# EAGLE board rgbstripe_fft_pcb (EAGLE 9.6.2)
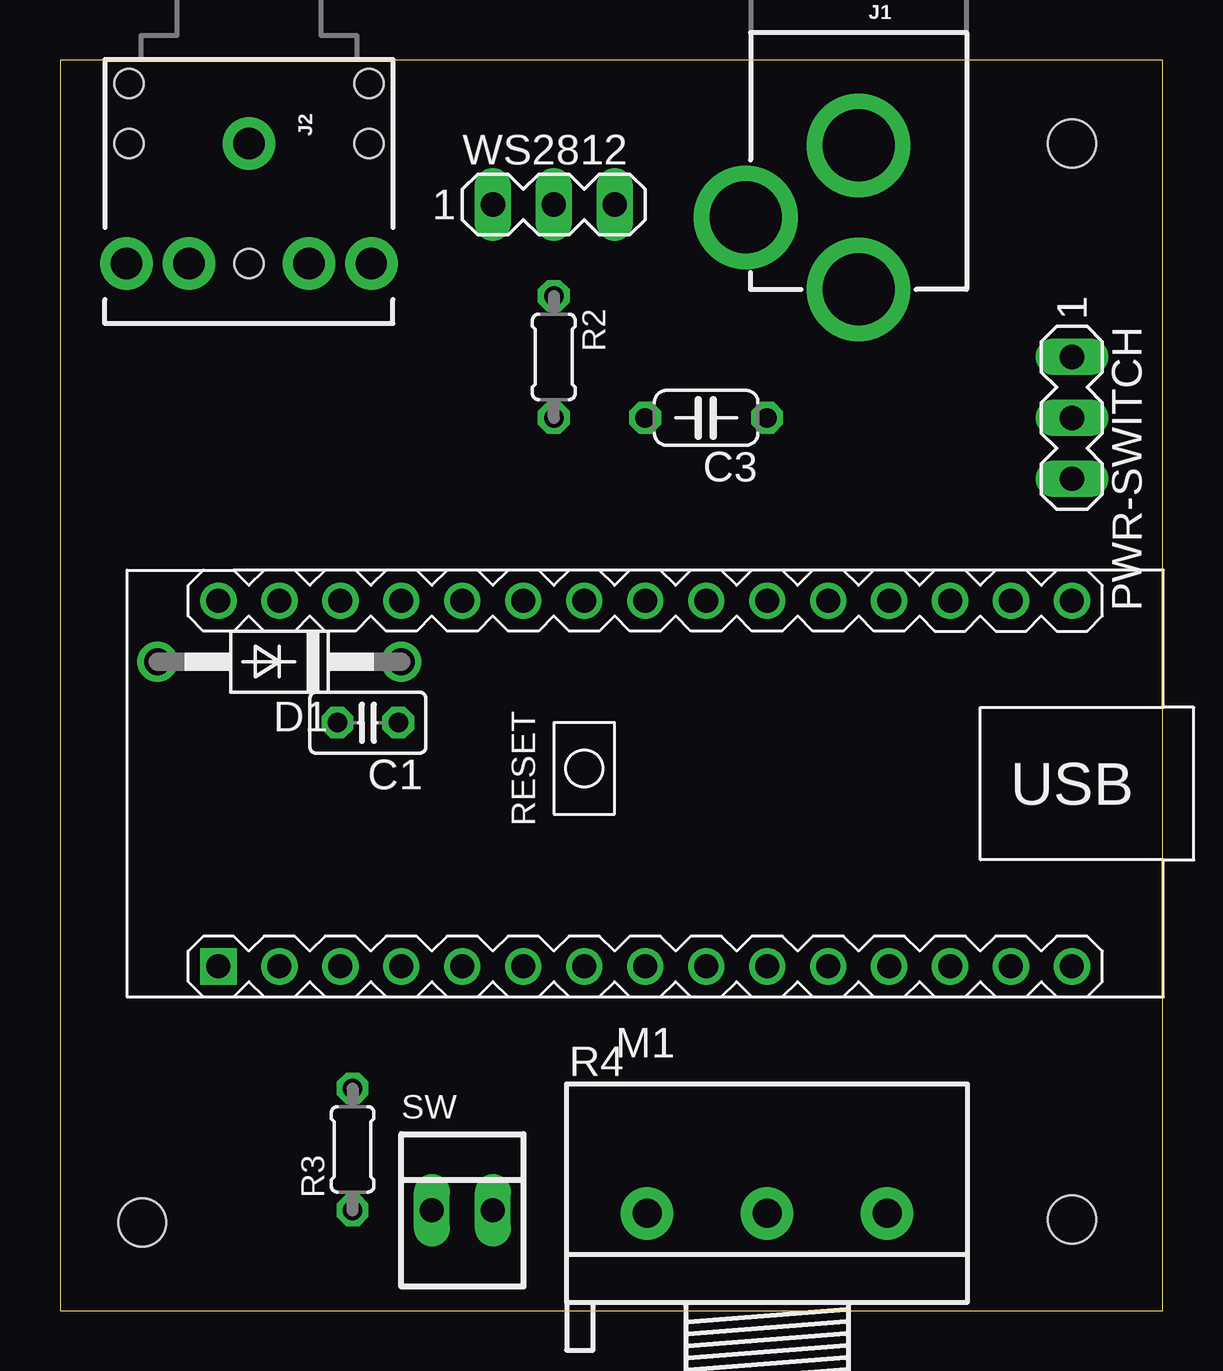
[diagram p0: board, top side]
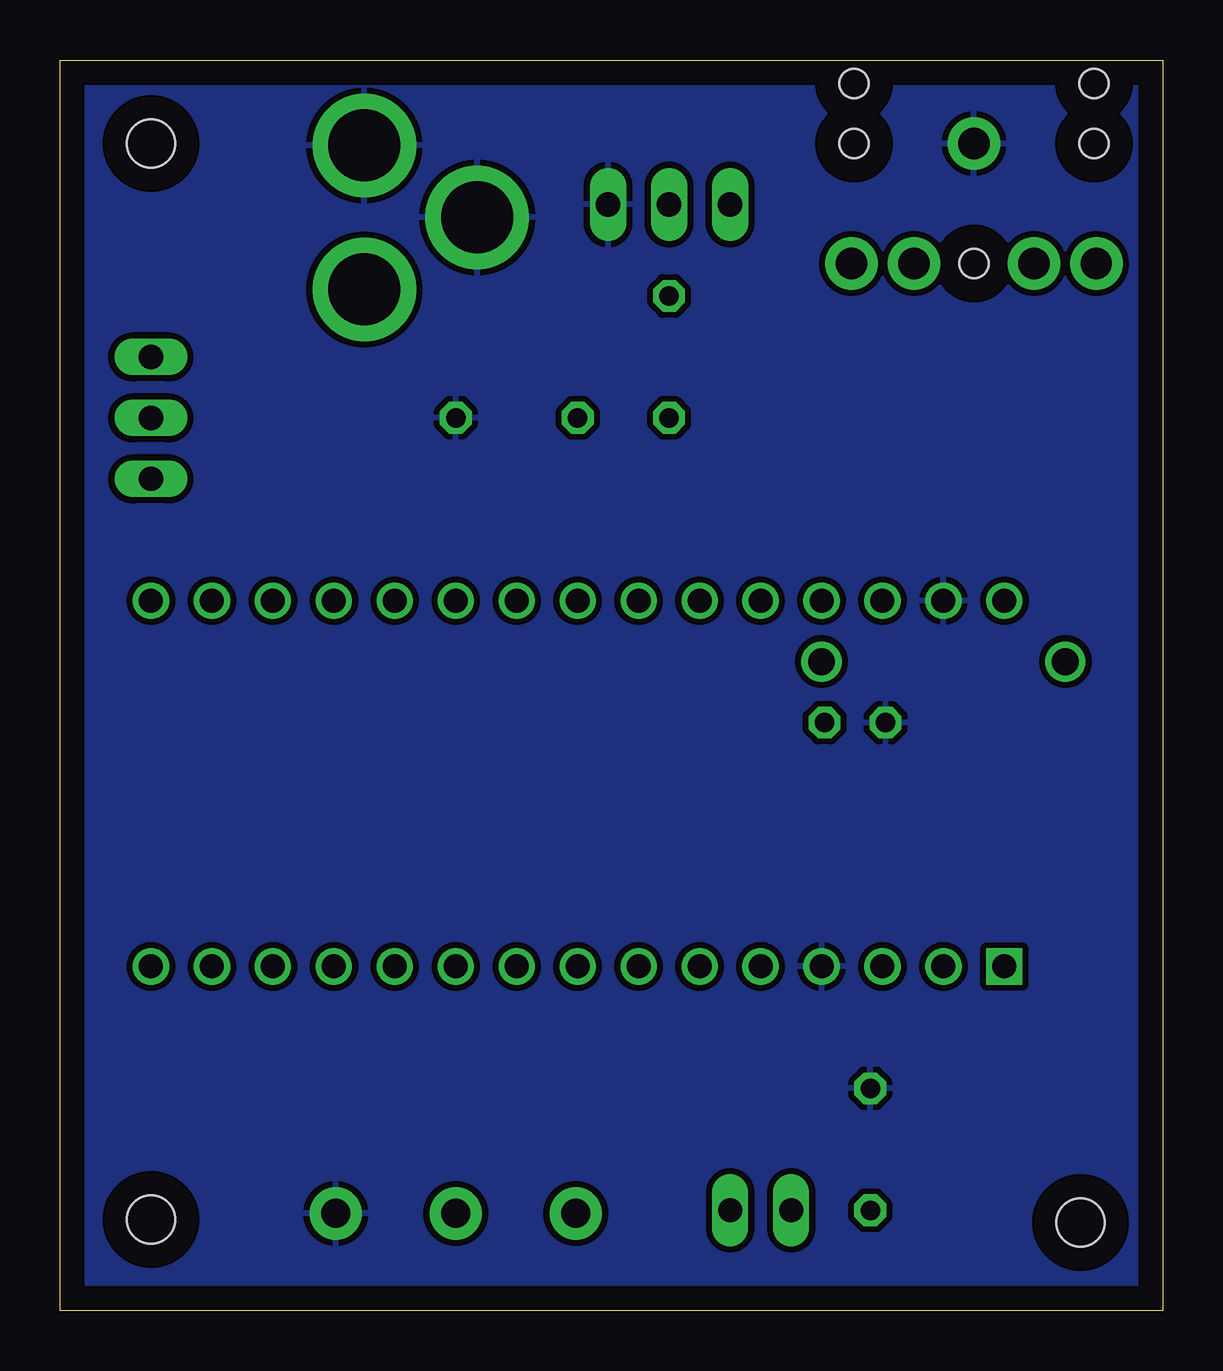
[diagram p1: board, bottom side, seen from below]

Size 45.95 x 52.12 mm. Coordinates in mm from the lower left corner, seen from the top.
Outline: 0,0 45.95,0 45.95,52.12 0,52.12 0,0
Copper layers (1*16): Top 0.035mm / dielectric 1.5mm / Bottom 0.035mm
Design rules "default *": minimum track width 36mil, minimum drill 0.35mm, track to track 10mil, track to pad 10mil, pad to pad 6mil, via to via 6mil, smd to smd 6mil, copper to edge 40mil, drill to drill 6mil, minimum pad ring 10mil, minimum via ring 8mil, stop-mask expansion 4mil, vias tented up to drill 0mil, thermal gap 10mil
Holes 2 mm at 42.16,3.81 3.43,3.68 42.16,48.64

## Footprints (pad centres in the part's own frame; a part is rotated, then mirrored left to right if it is on the bottom)
C025-025X050 = drill 0.813 octagon: 1 -1.27,0; 2 1.27,0
C050-024X044 = drill 0.813 octagon: 1 -2.54,0; 2 2.54,0
DO41-10 = drill 1.118: A 5.08,0; C -5.08,0
POWER_JACK_PTH = drill 2.997 pad 4.318: GND 0,7.7; GNDBREAK 4.7,10.7; PWR 0,13.7
AUDIO-JACK-KIT = drill 1.3 pad 2.184: RING 5,5.1; RSH 5,2.5; SLEEVE 0,0; TIP 5,-5.1; TSH 5,-2.5 | hole 1.2: 0,5; -2.5,5; -2.5,-5; 0,-5; 5,0
ARDUINO-NANO-3.0 = drill 1 square: J1.1 17.78,7.62 | drill 1: J1.2 15.24,7.62; J1.3 12.7,7.62; J1.4 10.16,7.62; J1.5 7.62,7.62; J1.6 5.08,7.62; J1.7 2.54,7.62; J1.8 0,7.62; J1.9 -2.54,7.62; J1.10 -5.08,7.62; J1.11 -7.62,7.62; J1.12 -10.16,7.62; J1.13 -12.7,7.62; J1.14 -15.24,7.62; J1.15 -17.78,7.62; J2.1 17.78,-7.62; J2.2 15.24,-7.62; J2.3 12.7,-7.62; J2.4 10.16,-7.62; J2.5 7.62,-7.62; J2.6 5.08,-7.62; J2.7 2.54,-7.62; J2.8 0,-7.62; J2.9 -2.54,-7.62; J2.10 -5.08,-7.62; J2.11 -7.62,-7.62; J2.12 -10.16,-7.62; J2.13 -12.7,-7.62; J2.14 -15.24,-7.62; J2.15 -17.78,-7.62
MA03-1 = drill 1.016 long: 1 -2.54,0; 2 0,0; 3 2.54,0
0204/5 = drill 0.813 octagon: 1 -2.54,0; 2 2.54,0
3RP/1610N = drill 1.2 pad 2.184: 1 -5,0; 2 0,0; 3 5,0
22-23-2021 = drill 1 long: 1 -1.27,0; 2 1.27,0

## Placement (x,y rotation side)
C1  10nF  [C025-025X050]  12.83,24.51 180 top
C3  1000uF  [C050-024X044]  26.92,37.21 180 top
D1  1N4004  [DO41-10]  9.14,27.05 180 top
J1  POWER_JACK  [POWER_JACK_PTH]  33.27,56.26 180 top
J2  AUDIO_JACK_3.5MM_KIT  [AUDIO-JACK-KIT]  7.87,48.64 270 top
M1  ARDUINO-NANO-3.0  [ARDUINO-NANO-3.0]  24.38,21.97 180 top
PWR-SWITCH  [MA03-1]  42.16,37.21 270 top
R2  220  [0204/5]  20.57,39.75 270 top
R3  10k  [0204/5]  12.19,6.73 90 top
R4  [3RP/1610N]  29.46,4.06 0 top
SW  22-23-2021  [22-23-2021]  16.76,4.19 0 top
WS2812  [MA03-1]  20.57,46.1 0 top

## Library data of the parts
C1 C3 R2 R3 = resistor
D1 = diode
J1 = SparkFun-Connectors; PROD_ID: CONN-08197
J2 = SparkFun-Connectors; PROD_ID: CONN-08774; SF_ID: PRT-08032
M1 = diy-modules-nano
PWR-SWITCH WS2812 = con-lstb; OC_FARNELL: unknown; OC_NEWARK: unknown
R4 = pot
SW = con-molex; MF: MOLEX; MPN: 22-23-2021; OC_FARNELL: 1462926; OC_NEWARK: 25C3832

## Nets
3V3: M1.J2.14
GND: C1.2 C3.1 J1.GND J1.GNDBREAK J2.SLEEVE M1.J1.4 M1.J2.2 R3.2 R4.3 WS2812.3
N$1: C1.1 D1.C M1.J2.4
N$6: J2.RING M1.J2.11
N$8: M1.J1.5
N$14: M1.J1.9 R2.2
N$15: M1.J2.10 R4.2
N$16: R2.1 WS2812.2
N$17: M1.J1.6 R3.1 SW.1
N$19: J1.PWR PWR-SWITCH.2
VCC: C3.2 D1.A PWR-SWITCH.3 R4.1 SW.2 WS2812.1
VIN: M1.J2.1

## Tracks (layer width: path | path; a pad name or v marks a point on that pad's centre or on a via)
GND
  pour Bottom: -1.02,-0.89 -1.02,53.72 48.51,53.72 48.51,-2.16 -1.02,-2.16